# EAGLE board transmitter (EAGLE 9.5.0)
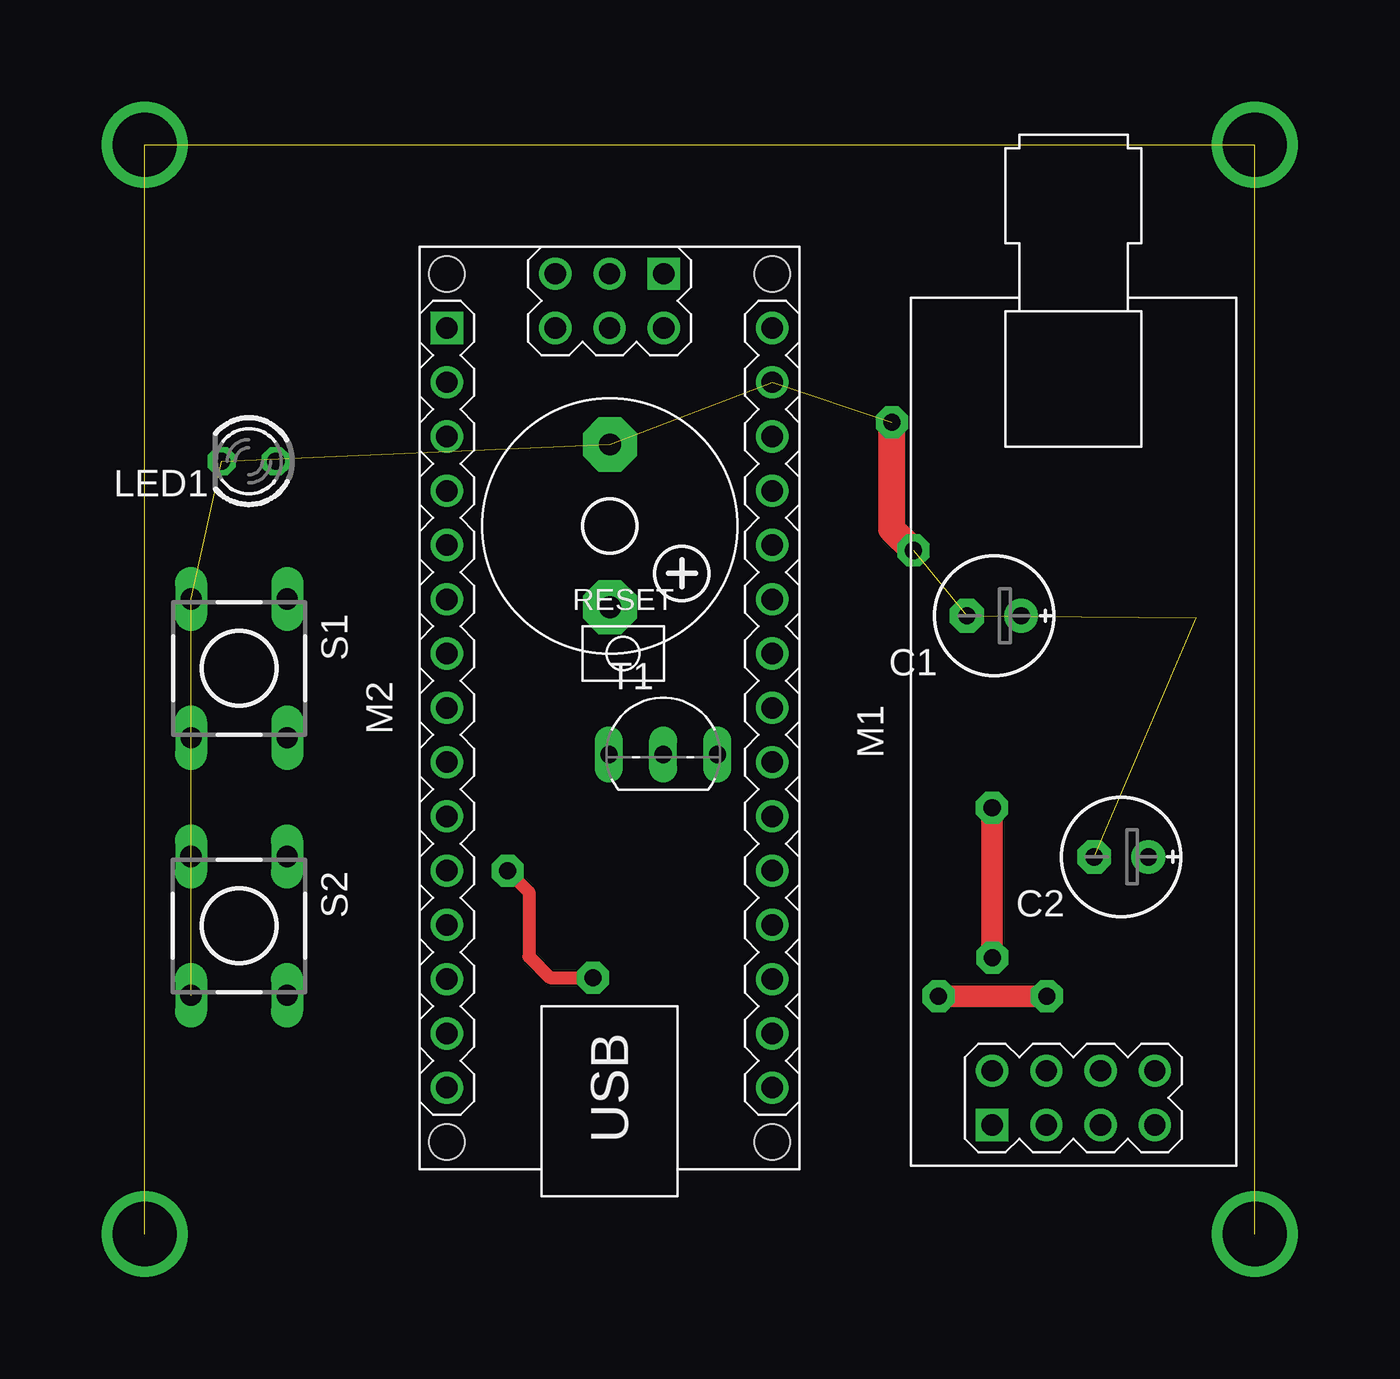
[diagram p0: board, top side]
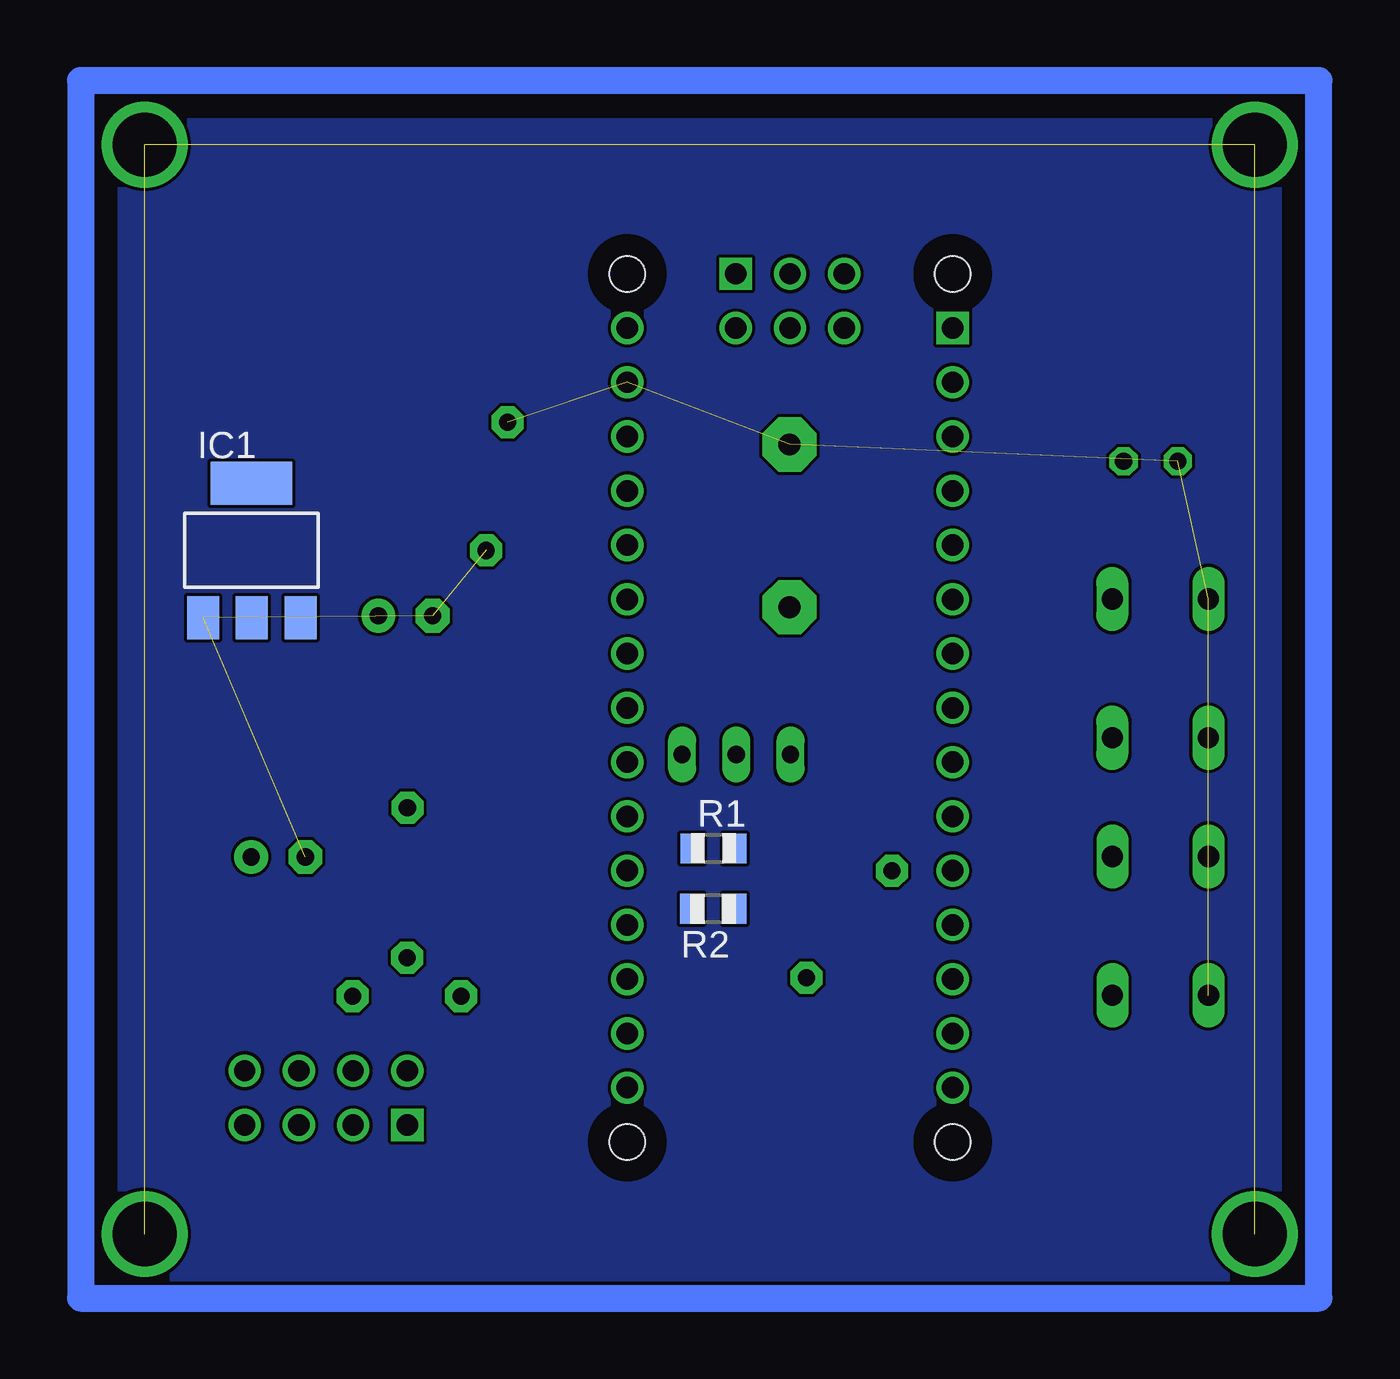
[diagram p1: board, bottom side, seen from below]

No outline drawn. Coordinates in mm, seen from the top.
Copper layers (1*16): Top 0.035mm / dielectric 1.5mm / Bottom 0.035mm
Design rules "default": minimum track width 6mil, minimum drill 0.35mm, track to track 6mil, track to pad 6mil, pad to pad 6mil, via to via 6mil, smd to smd 6mil, copper to edge 40mil, drill to drill 6mil, minimum pad ring 10mil, minimum via ring 8mil, stop-mask expansion 4mil, vias tented up to drill 0mil, thermal gap 10mil

## Footprints (pad centres in the part's own frame; a part is rotated, then mirrored left to right if it is on the bottom)
E2,5-6E = drill 0.813 pad 1.575: + -1.27,0 | drill 0.813 pad 1.575 octagon: - 1.27,0
SOT223 = smd 1.499 x 2.007: 1 -2.261,-3.15; 2 0.025,-3.15; 3 2.311,-3.15 | smd 3.81 x 2.007: 4 0,3.15
LED3MM = drill 0.813 octagon: A -1.27,0; K 1.27,0
WIRELESS-NRF24L01-PA-EXT = drill 1 square: 1 -18.415,3.81 | drill 1: 2 -15.875,3.81; 3 -18.415,1.27; 4 -15.875,1.27; 5 -18.415,-1.27; 6 -15.875,-1.27; 7 -18.415,-3.81; 8 -15.875,-3.81
ARDUINO-NANO-3.0#ISP = drill 1 square: J1.1 17.78,7.62; J4.1 20.32,-2.54 | drill 1: J1.2 15.24,7.62; J1.3 12.7,7.62; J1.4 10.16,7.62; J1.5 7.62,7.62; J1.6 5.08,7.62; J1.7 2.54,7.62; J1.8 0,7.62; J1.9 -2.54,7.62; J1.10 -5.08,7.62; J1.11 -7.62,7.62; J1.12 -10.16,7.62; J1.13 -12.7,7.62; J1.14 -15.24,7.62; J1.15 -17.78,7.62; J2.1 17.78,-7.62; J2.2 15.24,-7.62; J2.3 12.7,-7.62; J2.4 10.16,-7.62; J2.5 7.62,-7.62; J2.6 5.08,-7.62; J2.7 2.54,-7.62; J2.8 0,-7.62; J2.9 -2.54,-7.62; J2.10 -5.08,-7.62; J2.11 -7.62,-7.62; J2.12 -10.16,-7.62; J2.13 -12.7,-7.62; J2.14 -15.24,-7.62; J2.15 -17.78,-7.62; J4.2 17.78,-2.54; J4.3 20.32,0; J4.4 17.78,0; J4.5 20.32,2.54; J4.6 17.78,2.54 | hole 1.651: -20.32,7.62; -20.32,-7.62; 20.32,-7.62; 20.32,7.62
R0805 = smd 1.1 x 1.4: 1 -1,0; 2 1,0
DTS-6 = drill 1 long: 1 -3.25,2.25; 2 3.25,2.25; 3 -3.25,-2.25; 4 3.25,-2.25
F/CM12P = drill 1.016 pad 2.54 octagon: + 3.81,0; - -3.81,0
TO92-EBC-OVAL = drill 0.813 long: B 0,-1.27; C 2.54,-1.27; E -2.54,-1.27

## Placement (x,y rotation side)
C1  [E2,5-6E]  42.78,30.94 180 top
C2  [E2,5-6E]  48.74,19.66 180 top
IC1  REG1117  [SOT223]  50,34 0 bottom
LED1  TLLR4400  [LED3MM]  7.88,38.18 180 top
M1  WIRELESS-NRF24L01-PA-EXT  [WIRELESS-NRF24L01-PA-EXT]  46.5,25.52 90 top
M2  ARDUINO-NANO-3.0#ISP  [ARDUINO-NANO-3.0#ISP]  24.78,26.63 90 top
R1  [R0805]  28.35,20.05 0 bottom
R2  [R0805]  28.37,17.23 180 bottom
S1  DTS-6  [DTS-6]  7.43,28.48 270 top
S2  DTS-6  [DTS-6]  7.43,16.43 270 top
SG1  F/CM12P  [F/CM12P]  24.8,35.16 270 top
T1  2N2222  [TO92-EBC-OVAL]  27.29,25.72 0 top

## Library data of the parts
C1 C2 = rcl; SPICEPREFIX: C
IC1 = burr-brown; MPN: REG1117; OC_FARNELL: 1097566; OC_NEWARK: 14P6981
LED1 = led; MF: VISHAY SEMICONDUCTOR; OC_FARNELL: 1612437
M1 M2 = Diy Library
R1 R2 T1 = adafruit
S1 S2 = switch-tact
SG1 = buzzer; OC_FARNELL: unknown; OC_NEWARK: unknown

## Nets
3V3: M2.J2.14
GND: C1.- C2.- IC1.1 LED1.K M2.J2.2 S1.3 S1.4 S2.3 S2.4 SG1.-
S$16: IC1.2
VIN: M2.J2.1

## Tracks (layer width: path | path; a pad name or v marks a point on that pad's centre or on a via)
CSN  (via drill 0.8 pad 1.5)
  Top 0.61: v20,19 21,18 21,15 22,14 v24,14
GND  (via drill 0.8 pad 1.5)  (10 unrouted)
  Top 1.27: v39,34 38,35 v38,40
GNDA
  pour Bottom: 56,54 2,54 2,0 56,0
N$4
  Bottom 1.27: 0,56 58,56 58,-1 0,-1 0,56
N$5  (via drill 3 pad 1.3)  (3 unrouted)
  other vias: 3,2 55,2 55,53 3,53
S$8  (via drill 0.8 pad 1.5)
  Top 1.016: v45.26,13.14 v40.19,13.14 v40.18,13.14
VCC3  (via drill 0.8 pad 1.5)
  Top 1.016: v42.69,21.95 42.69,14.97 v42.71,14.95 v42.71,14.94

## Text on the board
tSilk: Buzzer | LED | Button 1 | NRF24L01+PA | ARDUINO | Nano | Button 2